# Altium PCB верхняя плата версия 4.PcbDoc
Units mm, origin at the board's own origin, x right, y up, seen from the top; angles counter-clockwise.
Board outline 53 x 45 mm, 4 copper layers (Top Layer, Layer 1, Layer 2, Bottom Layer), stack 1.083 mm thick; 122 components, 141 nets, 830 pads, 120 vias.
Unrouted connection lines stored in the file: 346.
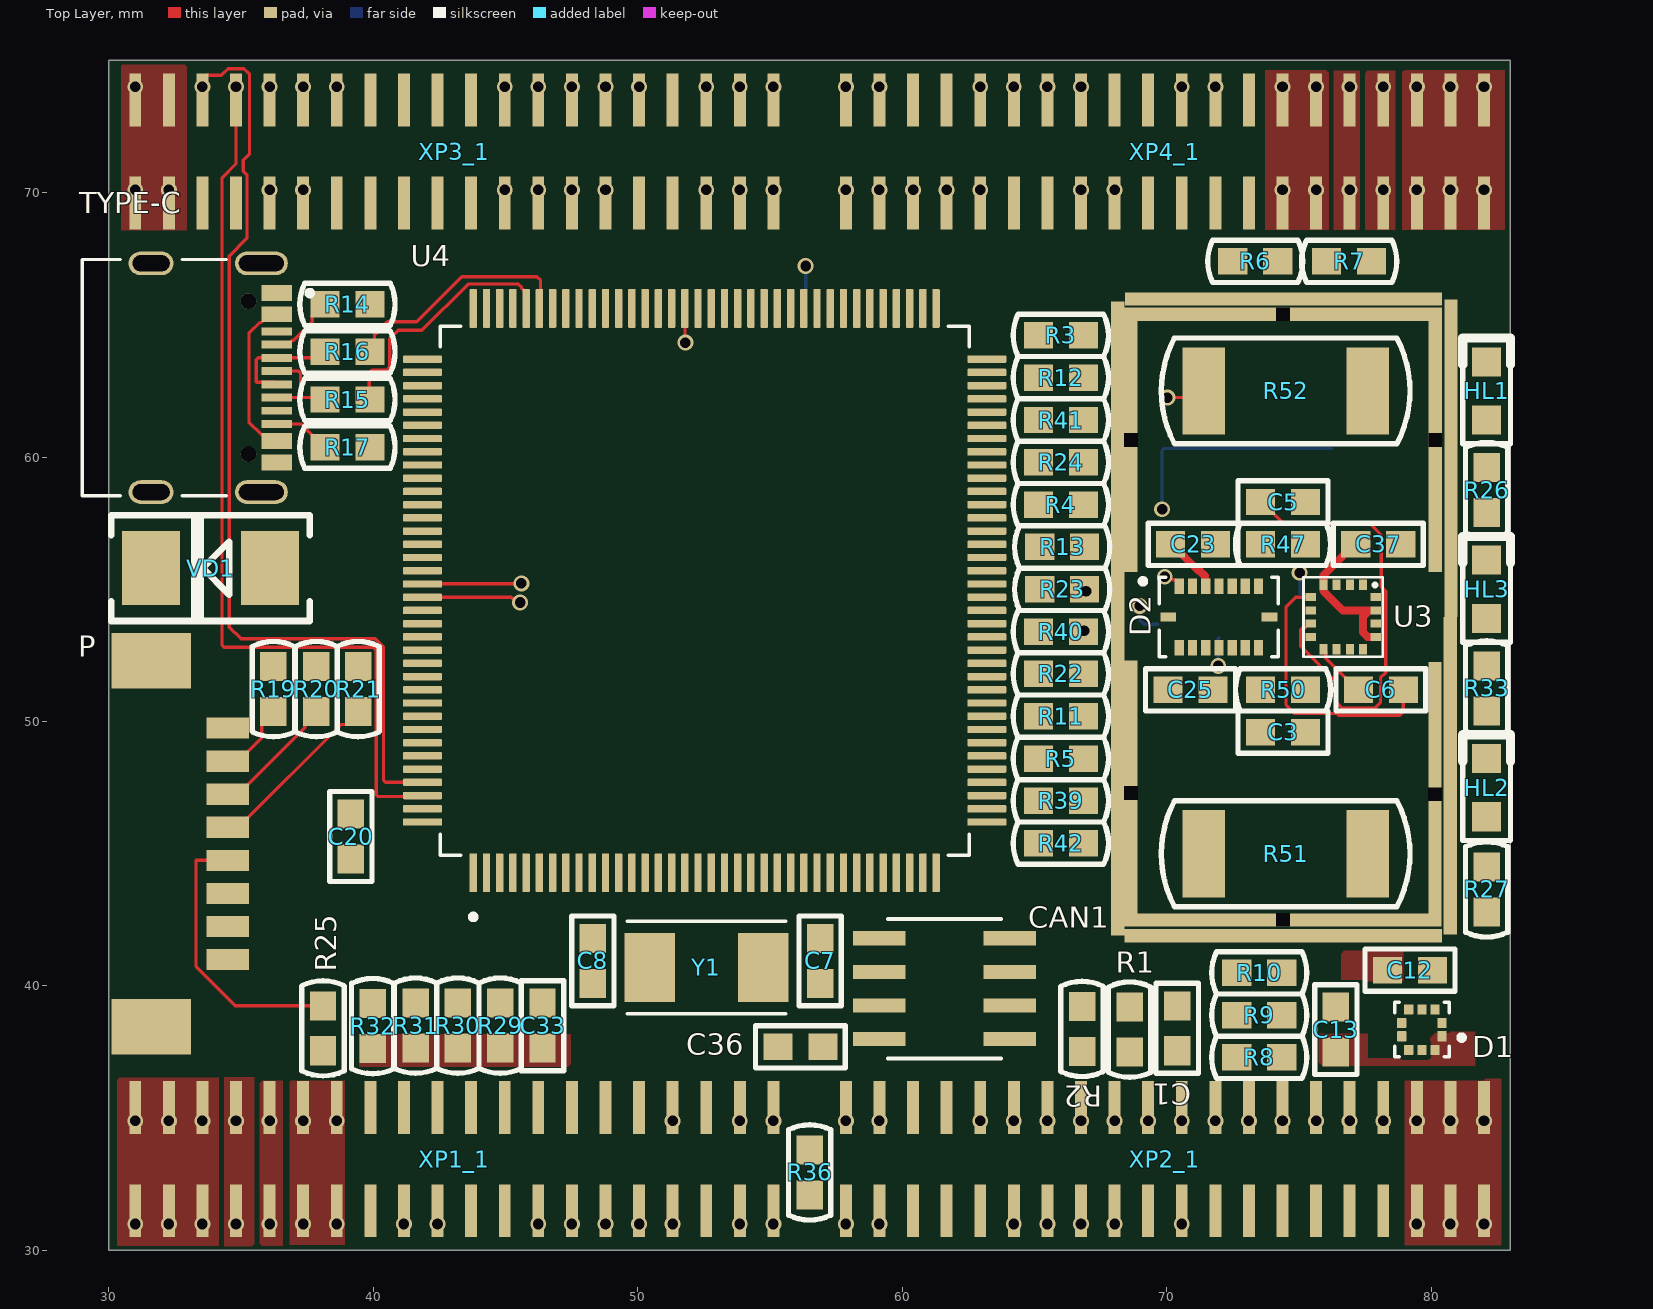
[diagram p0: Top Layer view]
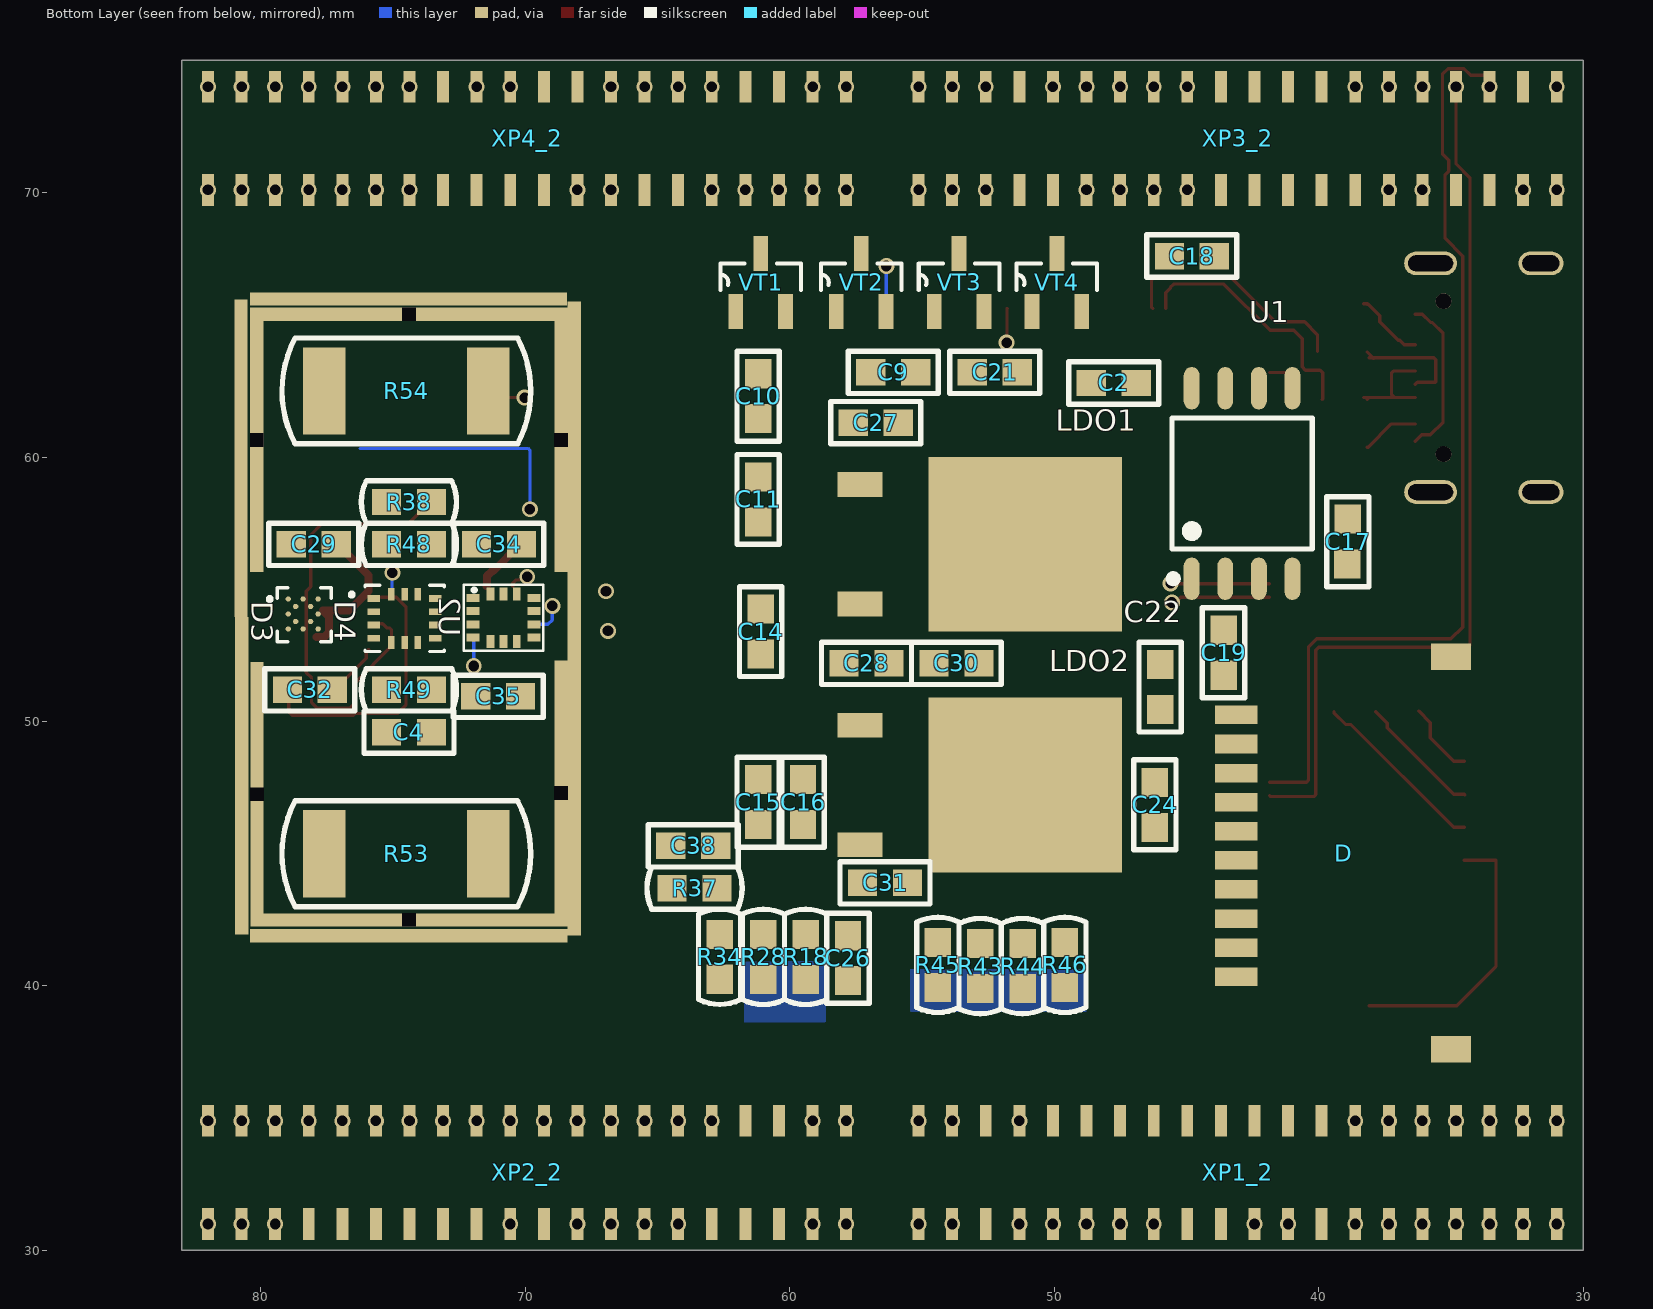
[diagram p1: Bottom Layer view, seen from below]
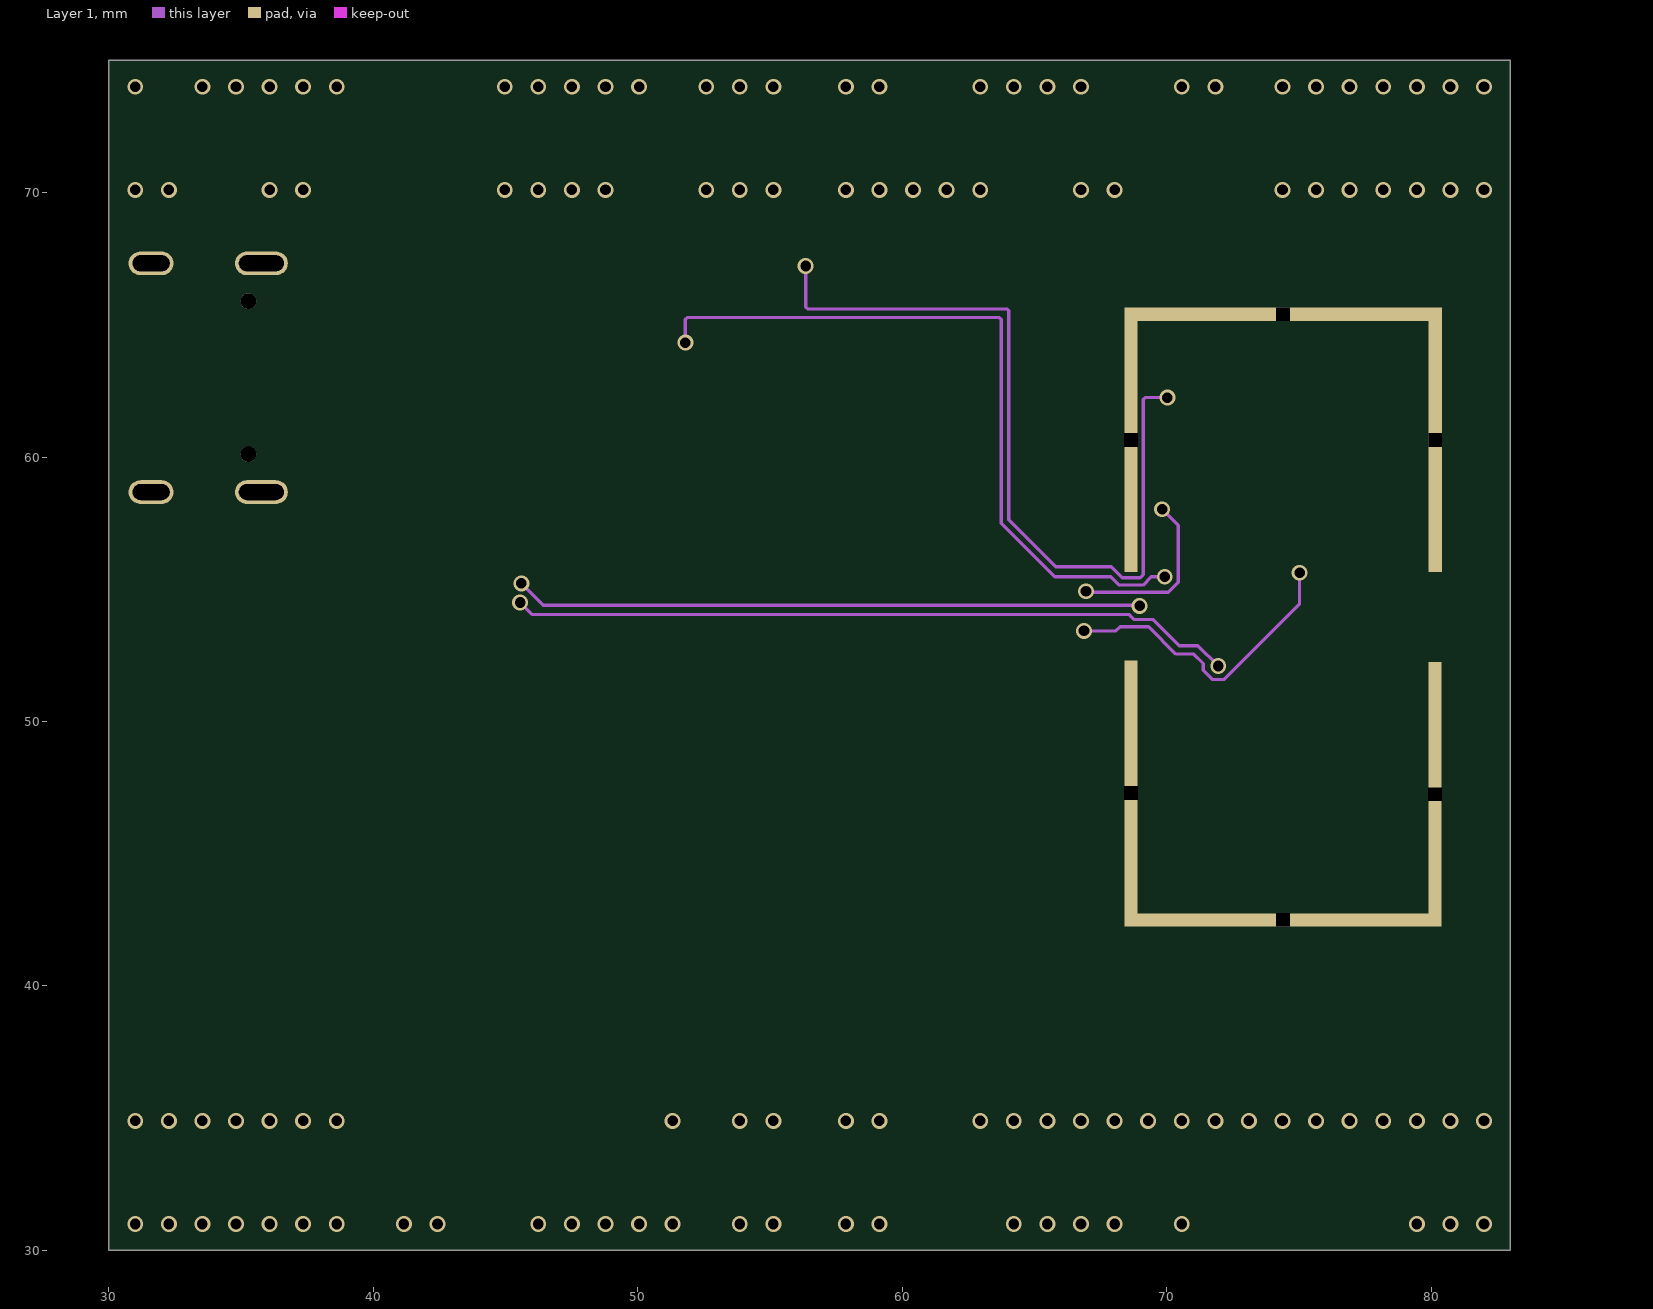
[diagram p2: Layer 1]

## Layer stack, top to bottom
Top Solder: solder mask 0.0102, Solder Resist, Dk 3.5
Top Layer: signal copper 0.0356
Dielectric 2: prepreg 0.0711, PP-006, Dk 4.1
Layer 1: signal copper 0.035
Dielectric 1: core 0.8, FR4 Tg135, Dk 4.5
Layer 2: signal copper 0.035
Dielectric 3: prepreg 0.0711, PP-006, Dk 4.1
Bottom Layer: signal copper 0.0356
Bottom Solder: solder mask 0.0102, Solder Resist, Dk 3.5

## Board outline
30,30 83,30 83,75 30,75

## Design rules (kind name [scope] priority, off if disabled: settings)
Clearance [All] p1: gap=0.125 ignorepadtopadclearanceinfootprint=FALSE except(0.2: Arc-Poly Track-Poly SMDPad-Poly THPad-Poly Via-Poly Fill-Poly Poly-Poly)
ComponentClearance [All] p1: gap=0 collisioncheckmode=3 verticalgap=0 showdistances=FALSE
PolygonConnect [All] p1: connectstyle=Direct reliefconductorwidth=0.254 reliefentries=4 polygonreliefangle="90 Angle" airgapwidth=0.254
RoutingVias [All] p1: holewidth=0.4 width=0.6 viastyle="Through Hole" minholewidth=0.4 minwidth=0.6 maxholewidth=0.4 maxwidth=0.6
SolderMaskExpansion [All] p1: expansion=0.05 istentingtop=FALSE
Width Width_5 [InNet('3V3')] p1: maxlimit=0.3 minlimit=0.3 preferedwidth=0.3 minimp=50.000000 maximp=50.000000 favimp=50.000000
Width Width_4 [InNet('GND')] p2: maxlimit=0.5 minlimit=0.5 preferedwidth=0.5 minimp=50.000000 maximp=50.000000 favimp=50.000000
Width Width_3 [InNet('5V')] p3: maxlimit=0.5 minlimit=0.5 preferedwidth=0.5 minimp=50.000000 maximp=50.000000 favimp=50.000000
Width Width_2 [InNet('4V2')] p4: maxlimit=0.4 minlimit=0.4 preferedwidth=0.4 minimp=50.000000 maximp=50.000000 favimp=50.000000
Width Width_1 [InNet('3V3_SEN')] p5: maxlimit=0.3 minlimit=0.3 preferedwidth=0.3 minimp=50.000000 maximp=50.000000 favimp=50.000000
Width [All] p6: maxlimit=0.125 minlimit=0.125 preferedwidth=0.125 minimp=50.000000 maximp=50.000000 favimp=50.000000
29 further rules are at their usual default settings.

## Components (designator, comment, footprint, x,y, rotation, side; value= is the part's Value field where it differs from the comment)
C1 "47 nF" C0603#1 70.4,38.4 r90 top
C2 "100 nF" C0603#1 47.75,62.8 r180 bottom
C3 "100 nF" C0603#1 74.4,49.6 r0 top
C4 "100 nF" C0603#1 74.4,49.6 r180 bottom
C5 "4.7 uF" C0603#1 74.4,58.3 r180 top
C6 "0.22 uF" C0603#1 78.1,51.2 r180 top
C7 "22 pF" C0603#1 56.9,40.95 r90 top
C8 "22 pF" C0603#1 48.3,40.95 r90 top
C9 "100 nF" C0603#1 56.088,63.2 r180 bottom
C10 "100 nF" C0603#1 61.2,62.3 r90 bottom
C11 "100 nF" C0603#1 61.2,58.4 r90 bottom
C12 "100 nF" C0603#1 79.2,40.6 r180 top
C13 "100 nF" C0603#1 76.4,38.35 r270 top
C14 "100 nF" C0603#1 61.1,53.4 r90 bottom
C15 "100 nF" C0603#1 61.2,46.95 r90 bottom
C16 "100 nF" C0603#1 59.5,46.95 r90 bottom
C17 "100 nF" C0603#2 38.9,56.8 r90 bottom
C18 "100 nF" C0603#1 44.8,67.6 r180 bottom
C19 "100 nF" C0603#1 43.6,52.6 r270 bottom
C20 "100 nF" C0603#1 39.15,45.65 r90 top
C21 "100 nF" C0603#1 52.25,63.2 r180 bottom
C22 "100 nF" C0603#1 46,51.3 r270 bottom
C23 "100 nF" C0603#1 71,56.7 r180 top
C24 "100 nF" C0603#1 46.2,46.85 r270 bottom
C25 "100 nF" C0603#1 70.9,51.2 r180 top
C26 "100 nF" C0603#1 57.8,41.05 r90 bottom
C27 "0.1 uF" C0603#1 56.75,61.3 r0 bottom
C28 "10 uF" C0603#1 57.1,52.2 r180 bottom
C29 "100 nF" C0603#1 78,56.7 r180 bottom
C30 "0.1 uF" C0603#1 53.7,52.2 r0 bottom
C31 "10 uF" C0603#1 56.4,43.9 r0 bottom
C32 "100 nF" C0603#1 78.15,51.2 r180 bottom
C33 "0.1 uF" C0603#1 46.4,38.5 r270 top
C34 "100 nF" C0603#1 71,56.7 r180 bottom
C35 "100 nF" C0603#1 71.025,50.95 r180 bottom
C36 "100 nF" C0603#1 56.15,37.7 r180 top
C37 "100 nF" C0603#1 78,56.7 r180 top
C38 "100 nF" C0603#1 63.65,45.3 r180 bottom
CAN1 "TJA1040T" SO-8_S 61.6,39.9 r0 top
D "D" GTFP08131Y2HR 35.8,45.4 r270 bottom locked
D1 "BMP388" PQFN50P200X200X80-10N 79.65,38.35 r180 top
D2 "BMI088" PQFN50P450X300X100-16N 71.975,53.95 r0 top
D3 "BMM150" XDCR_BMM150 78.365,54.031 r180 bottom
D4 "BMI270" XDCR_BMI270 74.563,53.9 r180 bottom
HL1 "" LD0805 82.1,62.5 r90 top
HL2 "" LD0805 82.1,47.5 r90 top
HL3 "" LD0805 82.1,55 r90 top
LDO1 "КФ1158Н" TO228P972X240-3N 51.252,56.7 r270 bottom
LDO2 "КФ1158Н" TO228P972X240-3N 51.252,47.6 r270 bottom
P "Header 1x8" "PicoBlade 8pin" 34.5,45.385 r270 top
R1 "60Om" R0603 68.6,38.35 r90 top
R2 "60 Om" R0603 66.8,38.375 r90 top
R3 "0" R0603 66,64.6 r180 top
R4 "0" R0603 66,58.2 r180 top
R5 "0" R0603 66,48.6 r180 top
R6 "2.2k" R0603 73.35,67.4 r0 top
R7 "2.2k" R0603 76.9,67.4 r180 top
R8 "0" R0603 73.5,37.3 r0 top
R9 "0" R0603 73.5,38.9 r0 top
R10 "0" R0603 73.5,40.5 r0 top
R11 "0" R0603 66,50.2 r0 top
R12 "0" R0603 66,63 r180 top
R13 "0" R0603 66.05,56.6 r0 top
R14 "5,1 кОм" R0603 39.025,65.775 r180 top
R15 "68" R0603 39.025,62.175 r0 top
R16 "68" R0603 39.025,63.975 r0 top
R17 "5,1 кОм" R0603 39.025,60.375 r0 top
R18 "47 Ом" R0603 59.4,41.1 r90 bottom
R19 "47 кОм" R0603 36.225,51.225 r90 top
R20 "47 кОм" R0603 37.85,51.225 r90 top
R21 "47 кОм" R0603 39.425,51.225 r90 top
R22 "0" R0603 66,51.8 r0 top
R23 "0" R0603 66.05,55 r0 top
R24 "0" R0603 66,59.8 r180 top
R25 "47 кОм" R0603 38.1,38.4 r270 top
R26 "220" R0603 82.1,58.75 r270 top
R27 "220" R0603 82.1,43.65 r270 top
R28 "0" R0603 61,41.1 r270 bottom
R29 "47 кОм" R0603 44.8,38.5 r90 top
R30 "47 кОм" R0603 43.2,38.5 r90 top
R31 "47 кОм" R0603 41.6,38.5 r90 top
R32 "47 кОм" R0603 39.98,38.484 r90 top
R33 "220" R0603 82.1,51.25 r90 top
R34 "0" R0603 62.65,41.103 r90 bottom
R36 "10 kOm" R0603 56.5,32.95 r90 top
R37 "0" R0603 63.6,43.7 r0 bottom
R38 "10 кОм" R0603 74.4,58.3 r0 bottom
R39 "0" R0603 66,47 r0 top
R40 "0" R0603 66,53.4 r0 top
R41 "0" R0603 66,61.4 r0 top
R42 "0" R0603 66,45.4 r0 top
R43 "Resistor" R0603 52.8,40.75 r270 bottom
R44 "Resistor" R0603 51.2,40.75 r270 bottom
R45 "Resistor" R0603 54.4,40.8 r270 bottom
R46 "Resistor" R0603 49.6,40.8 r270 bottom
R47 "Resistor_0,25W" R0603 74.4,56.7 r180 top
R48 "Resistor_0,25W" R0603 74.4,56.7 r0 bottom
R49 "Resistor_0,25W" R0603 74.4,51.2 r0 bottom
R50 "Resistor_0,25W" R0603 74.4,51.2 r0 top
R51 "Resistor_0,25W" R2512 74.5,45 r0 top
R52 "Resistor_0,25W" R2512 74.5,62.5 r0 top
R53 "Resistor_0,25W" R2512 74.5,45 r0 bottom
R54 "Resistor_0,25W" R2512 74.5,62.5 r180 bottom
TYPE-C "TYPE-C-31-M-12" HRO_TYPE-C-31-M-12 31.6,63 r270 top
U1 "W25Q128FVSIG" SOIC127P790X216-8N 42.9,59 r90 bottom
U2 "QMI8658" QMI8658 70.9,53.875 r0 bottom
U3 "QMC5883L" QMC5883L 76.675,54.025 r0 top
U4 "K1921BK01T2" QFP50P2200X2200X160-144N 52.53,54.95 r90 top
VD1 "" DO-214AA 33.85,55.8 r180 top
VT1 "MOSFET-N" SOT95P240X112-3N 61.1,66.6 r90 bottom
VT2 "MOSFET-N" SOT95P240X112-3N 57.3,66.6 r90 bottom
VT3 "MOSFET-N" SOT95P240X112-3N 53.6,66.6 r90 bottom
VT4 "MOSFET-N" SOT95P240X112-3N 49.9,66.6 r90 bottom
XP1_1 "PLLD-1.27-40S" "Headr 2x20 male" 42.851,33.447 r90 top
XP1_2 "PLLD-1.27-40S" "Headr 2x20 Female" 41.962,32.82 r90 bottom
XP2_1 "PLLD-1.27-40S" "Headr 2x20 male" 70.149,33.453 r270 top
XP2_2 "PLLD-1.27-40S" "Headr 2x20 Female" 71.038,33.08 r270 bottom
XP3_1 "PLLD-1.27-40S" "Headr 2x20 male" 42.851,71.547 r90 top
XP3_2 "PLLD-1.27-40S" "Headr 2x20 Female" 41.962,71.92 r90 bottom
XP4_1 "PLLD-1.27-40S" "Headr 2x20 male" 69.721,71.547 r90 top
XP4_2 "PLLD-1.27-40S" "Headr 2x20 Female" 68.832,71.92 r90 bottom
Y1 "8 мгц" XTAL_ABM7-8.000MHZ-8-R80-D2Y-T 52.6,40.7 r0 top

## Footprints (in the part's own frame and the unit in brackets; to place one, negate y for a bottom-side part, rotate by r counter-clockwise, add the part's x,y. Pads: shape width x height; smd on the part's side, far side on the other; paste and mask are expansions set on the pad)
C0603#1 [mm] "1608M"
  rect 1.1x1 smd: 1(-0.85,0) 2(0.85,0)
  silkscreen extent -1.7,-0.8 1.7,0.8, body extent -0.8,-0.4 0.8,0.4, height 0.91
C0603#2 [mm] "1608M"
  rect 1.1x1 smd: 1(-0.85,0.018) 2(0.85,0)
  silkscreen extent -1.7,-0.8 1.7,0.8, body extent -0.8,-0.4 0.8,0.4, height 0.91
DO-214AA [mm] "(SMB) Low profile package"
  rect 2.2x2.8 smd: 1(-2.25,0) 2(2.25,0)
  silkscreen extent -3.75,-2 3.75,2, body extent -2.7,-1.8 2.7,1.8, height 2.3
GTFP08131Y2HR [mm]
  rect 0.7x1.6 smd: 1(-4.85,-7.325) 2(-3.75,-7.325) 3(-2.65,-7.325) 4(-1.55,-7.325) 5(-0.45,-7.325) 6(0.65,-7.325) 7(1.75,-7.325) 8(2.85,-7.325) 9(3.95,-7.325) CD(5.05,-7.325)
  rect 1x1.5 smd: S1(-7.05,0.8) S2(7.8,0.8)
"Headr 2x20 Female" [mm]
  rect 1.2x0.45 smd: 1(-1.82,-10.962) 2(2.08,-10.962) 3(-1.82,-9.692) 4(2.08,-9.692) 5(-1.82,-8.422) 6(2.08,-8.422) 7(-1.82,-7.152) 8(2.08,-7.152) 9(-1.82,-5.882) 10(2.08,-5.882) 11(-1.82,-4.612) 12(2.08,-4.612) 13(-1.82,-3.342) 14(2.08,-3.342) 15(-1.82,-2.072) 16(2.08,-2.072) 17(-1.82,-0.802) 18(2.08,-0.802) 19(-1.82,0.468) 20(2.08,0.468) 21(-1.82,1.738) 22(2.08,1.738) 23(-1.82,3.008) 24(2.08,3.008) 25(-1.82,4.278) 26(2.08,4.278) 27(-1.82,5.548) 28(2.08,5.548) 29(-1.82,6.818) 30(2.08,6.818) 31(-1.82,8.088) 32(2.08,8.088) 33(-1.82,9.358) 34(2.08,9.358) 35(-1.82,10.628) 36(2.08,10.628) 37(-1.82,11.898) 38(2.08,11.898) 39(-1.82,13.168) 40(2.08,13.168)
"Headr 2x20 male" [mm]
  rect 2x0.45 smd: 1(-1.947,11.851) 2(1.953,11.851) 3(-1.947,10.581) 4(1.953,10.581) 5(-1.947,9.311) 6(1.953,9.311) 7(-1.947,8.041) 8(1.953,8.041) 9(-1.947,6.771) 10(1.953,6.771) 11(-1.947,5.501) 12(1.953,5.501) 13(-1.947,4.231) 14(1.953,4.231) 15(-1.947,2.961) 16(1.953,2.961) 17(-1.947,1.691) 18(1.953,1.691) 19(-1.947,0.421) 20(1.953,0.421) 21(-1.947,-0.849) 22(1.953,-0.849) 23(-1.947,-2.119) 24(1.953,-2.119) 25(-1.947,-3.389) 26(1.953,-3.389) 27(-1.947,-4.659) 28(1.953,-4.659) 29(-1.947,-5.929) 30(1.953,-5.929) 31(-1.947,-7.199) 32(1.953,-7.199) 33(-1.947,-8.469) 34(1.953,-8.469) 35(-1.947,-9.739) 36(1.953,-9.739) 37(-1.947,-11.009) 38(1.953,-11.009) 39(-1.947,-12.279) 40(1.953,-12.279)
HRO_TYPE-C-31-M-12 [mm]
  rect 0.6x1.14 smd mask+0.05: A1_B12(-3.2,4.75) A4_B9(-2.4,4.75) B1_A12(3.2,4.75) B4_A9(2.4,4.75)
  rect 0.3x1.14 smd mask+0.05: A5(-1.25,4.75) A6(-0.25,4.75) A7(0.25,4.75) A8(1.25,4.75) B5(1.75,4.75) B6(0.75,4.75) B7(-0.75,4.75) B8(-1.75,4.75)
  oval 0.9x2 hole 0.6 slot 1.7 at 90 deg: S1(-4.325,4.17) S2(4.325,4.17)
  oval 0.9x1.7 hole 0.6 slot 1.4 at 90 deg: S3(-4.325,0) S4(4.325,0)
  round 0.6 hole 0.6 unplated: ""(-2.89,3.68) ""(2.89,3.68)
  silkscreen extent -4.47,-2.6 4.47,6.1, body extent -4.47,-2.6 4.47,5.31, height 3.31
LD0805 [mm]
  rect 1.1x1.1 smd: 1(-1.1,0) 2(1.1,0)
  silkscreen extent -2,-0.9 2,0.9, body extent -1,-0.62 1,0.63, height 0.73
"PicoBlade 8pin" [mm]
  rect 0.8x1.6 smd: 1(-4.365,0) 2(-3.115,0) 3(-1.865,0) 4(-0.615,0) 5(0.635,0) 6(1.885,0) 7(3.135,0) 8(4.385,0)
  rect 2.1x3 smd: S(-6.915,-2.9) S(6.935,-2.9)
PQFN50P200X200X80-10N [mm]
  rrect9% 0.35x0.38 smd: 1(-0.765,0.25) 2(-0.765,-0.25) 3(-0.5,-0.765) 4(0,-0.765) 5(0.5,-0.765) 6(0.765,-0.25) 7(0.765,0.25) 8(0.5,0.765) 9(0,0.765) 10(-0.5,0.765)
  silkscreen extent -1.6,-1.03 1.03,1.03
PQFN50P450X300X100-16N [mm]
  rect 0.35x0.59 smd: 1(-1.5,1.165) 2(-1,1.165) 3(-0.5,1.165) 4(0,1.165) 5(0.5,1.165) 6(1,1.165) 7(1.5,1.165) 9(1.5,-1.165) 10(1,-1.165) 11(0.5,-1.165) 12(0,-1.165) 13(-0.5,-1.165) 14(-1,-1.165) 15(-1.5,-1.165)
  rect 0.59x0.35 smd: 8(1.915,0) 16(-1.915,0)
  silkscreen extent -2.97,-1.5 2.25,1.5
QFP50P2200X2200X160-144N [mm]
  rrect25% 1.47x0.28 smd: 1(-10.67,8.75) 2(-10.67,8.25) 3(-10.67,7.75) 4(-10.67,7.25) 5(-10.67,6.75) 6(-10.67,6.25) 7(-10.67,5.75) 8(-10.67,5.25) 9(-10.67,4.75) 10(-10.67,4.25) 11(-10.67,3.75) 12(-10.67,3.25) 13(-10.67,2.75) 14(-10.67,2.25) 15(-10.67,1.75) 16(-10.67,1.25) 17(-10.67,0.75) 18(-10.67,0.25) 19(-10.67,-0.25) 20(-10.67,-0.75) 21(-10.67,-1.25) 22(-10.67,-1.75) 23(-10.67,-2.25) 24(-10.67,-2.75) 25(-10.67,-3.25) 26(-10.67,-3.75) 27(-10.67,-4.25) 28(-10.67,-4.75) 29(-10.67,-5.25) 30(-10.67,-5.75) 31(-10.67,-6.25) 32(-10.67,-6.75) 33(-10.67,-7.25) 34(-10.67,-7.75) 35(-10.67,-8.25) 36(-10.67,-8.75) 73(10.67,-8.75) 74(10.67,-8.25) 75(10.67,-7.75) 76(10.67,-7.25) 77(10.67,-6.75) 78(10.67,-6.25) 79(10.67,-5.75) 80(10.67,-5.25) 81(10.67,-4.75) 82(10.67,-4.25) 83(10.67,-3.75) 84(10.67,-3.25) 85(10.67,-2.75) 86(10.67,-2.25) 87(10.67,-1.75) 88(10.67,-1.25) 89(10.67,-0.75) 90(10.67,-0.25) 91(10.67,0.25) 92(10.67,0.75) 93(10.67,1.25) 94(10.67,1.75) 95(10.67,2.25) 96(10.67,2.75) 97(10.67,3.25) 98(10.67,3.75) 99(10.67,4.25) 100(10.67,4.75) 101(10.67,5.25) 102(10.67,5.75) 103(10.67,6.25) 104(10.67,6.75) 105(10.67,7.25) 106(10.67,7.75) 107(10.67,8.25) 108(10.67,8.75)
  rrect25% 0.28x1.47 smd: 37(-8.75,-10.67) 38(-8.25,-10.67) 39(-7.75,-10.67) 40(-7.25,-10.67) 41(-6.75,-10.67) 42(-6.25,-10.67) 43(-5.75,-10.67) 44(-5.25,-10.67) 45(-4.75,-10.67) 46(-4.25,-10.67) 47(-3.75,-10.67) 48(-3.25,-10.67) 49(-2.75,-10.67) 50(-2.25,-10.67) 51(-1.75,-10.67) 52(-1.25,-10.67) 53(-0.75,-10.67) 54(-0.25,-10.67) 55(0.25,-10.67) 56(0.75,-10.67) 57(1.25,-10.67) 58(1.75,-10.67) 59(2.25,-10.67) 60(2.75,-10.67) 61(3.25,-10.67) 62(3.75,-10.67) 63(4.25,-10.67) 64(4.75,-10.67) 65(5.25,-10.67) 66(5.75,-10.67) 67(6.25,-10.67) 68(6.75,-10.67) 69(7.25,-10.67) 70(7.75,-10.67) 71(8.25,-10.67) 72(8.75,-10.67) 109(8.75,10.67) 110(8.25,10.67) 111(7.75,10.67) 112(7.25,10.67) 113(6.75,10.67) 114(6.25,10.67) 115(5.75,10.67) 116(5.25,10.67) 117(4.75,10.67) 118(4.25,10.67) 119(3.75,10.67) 120(3.25,10.67) 121(2.75,10.67) 122(2.25,10.67) 123(1.75,10.67) 124(1.25,10.67) 125(0.75,10.67) 126(0.25,10.67) 127(-0.25,10.67) 128(-0.75,10.67) 129(-1.25,10.67) 130(-1.75,10.67) 131(-2.25,10.67) 132(-2.75,10.67) 133(-3.25,10.67) 134(-3.75,10.67) 135(-4.25,10.67) 136(-4.75,10.67) 137(-5.25,10.67) 138(-5.75,10.67) 139(-6.25,10.67) 140(-6.75,10.67) 141(-7.25,10.67) 142(-7.75,10.67) 143(-8.25,10.67) 144(-8.75,10.67)
  silkscreen extent -12.44,-10 10,10
QMC5883L [mm]
  rect 0.4x0.3 smd: 1(1.225,0.675) 2(1.225,0.175) 3(1.225,-0.325) 4(1.225,-0.825) 9(-1.225,-0.825) 10(-1.225,-0.325) 11(-1.225,0.175) 12(-1.225,0.675)
  rect 0.3x0.4 smd: 5(0.75,-1.3) 6(0.25,-1.3) 7(-0.25,-1.3) 8(-0.75,-1.3) 13(-0.75,1.15) 14(-0.25,1.15) 15(0.25,1.15) 16(0.75,1.15)
  silkscreen extent -1.5,-1.58 1.5,1.42
QMI8658 [mm]
  rect 0.5x0.3 smd: 1(1.075,-0.8) 2(1.075,-0.3) 3(1.075,0.2) 4(1.075,0.7) 8(-1.225,0.7) 9(-1.225,0.2) 10(-1.225,-0.3) 11(-1.225,-0.8)
  rect 0.3x0.5 smd: 5(0.425,0.85) 6(-0.075,0.85) 7(-0.575,0.85) 12(-0.575,-0.95) 13(-0.075,-0.95) 14(0.425,-0.95)
  silkscreen extent -1.57,-1.3 1.43,1.2
R0603 [mm] "1608M"
  rect 1.1x1 smd: 1(-0.85,0) 2(0.85,0)
  silkscreen extent -1.8,-0.8 1.8,0.8, body extent -0.8,-0.4 0.8,0.4, height 0.38
R2512 [mm] "6432M"
  rect 1.6x3.3 smd: 1(-3.1,0) 2(3.1,0)
  silkscreen extent -4.7,-2 4.7,2, body extent -3.2,-1.6 3.2,1.6, height 0.7
SO-8_S [mil]
  rect 78x21 smd: 1(-97,75) 2(-97,25) 3(-97,-25) 4(-97,-75) 5(97,-75) 6(97,-25) 7(97,25) 8(97,75)
  silkscreen extent -84,-104 84,104, body extent -96,-118 96,118, height 69
SOIC127P790X216-8N [mm]
  oval 1.6x0.6 smd: 1(-3.6,1.905) 2(-3.6,0.635) 3(-3.6,-0.635) 4(-3.6,-1.905) 5(3.6,-1.905) 6(3.6,-0.635) 7(3.6,0.635) 8(3.6,1.905)
  silkscreen extent -3.82,-2.65 2.48,2.82
SOT95P240X112-3N [mil]
  rect 52x22 smd: 1(-43,37) 2(-43,-37) 3(43,0)
  silkscreen extent -11,-60 28,60
TO228P972X240-3N [mil]
  rect 37x67 smd: 1(-89,-240) 3(89,-240)
  rect 260x288 smd: 2(0,6)
XDCR_BMI270 [mm]
  rect 0.475x0.25 smd: 1(-1.163,0.75) 2(-1.163,0.25) 3(-1.163,-0.25) 4(-1.163,-0.75) 8(1.162,-0.75) 9(1.162,-0.25) 10(1.162,0.25) 11(1.162,0.75)
  rect 0.25x0.475 smd: 5(-0.5,-0.913) 6(0,-0.913) 7(0.5,-0.913) 12(0.5,0.912) 13(0,0.912) 14(-0.5,0.912)
  silkscreen extent -2.08,-1.25 1.5,1.25, body extent -1.5,-1.25 1.5,1.25, height 0.87
XDCR_BMM150 [mm]
  round 0.2 smd: A1(-0.601,0.601) A3(-0.035,0.601) A5(0.531,0.601) B2(-0.318,0.318) B4(0.248,0.318) C1(-0.601,0.035) C5(0.531,0.035) D2(-0.318,-0.248) D4(0.248,-0.248) E1(-0.601,-0.531) E3(-0.035,-0.531) E5(0.531,-0.531)
  silkscreen extent -1.38,-1.02 1.02,1.02
XTAL_ABM7-8.000MHZ-8-R80-D2Y-T [mm]
  rect 1.9x2.6 smd: 1(-2.15,0) 2(2.15,0)
  silkscreen extent -3,-1.75 3,1.75

## Part data
C1 C2 C3 C4 C5 C6 C7 C8 C9 C10 C11 C12 C13 C14 C15 C16 C17 C18 C19 C20 C21 C22 C23 C24 C25 C26 C27 C28 C29 C30 C31 C32 C33 C34 C35 C36 C37 C38: library part Capacitor, Published=18.05.2010, Publisher="Andrew Danich", Type=Конденсатор
D: library part GTFP08131Y2HR
HL1 HL2 HL3: library part Led-1, Published=03.12.2013, Publisher="Andrew Danich", Type="Индикатор единичный"
R1 R2 R3 R4 R5 R6 R7 R8 R9 R10 R11 R12 R13 R14 R15 R16 R17 R18 R19 R20 R21 R22 R23 R24 R25 R26 R27 R28 R29 R30 R31 R32 R33 R34 R36 R37 R38 R39 R40 R41 R42: library part Resistor, Published=24.03.2010, Publisher="Andrew Danich", Type=Резистор
VD1: library part Schottky
Y1: library part ABM7-8.000MHZ-8-R80-D2Y-T, "Crystal 22.1184MHz Ã‚Â±20ppm (Tol) Ã‚Â±30ppm (Stability) 18pF FUND 50Ohm 2-Pin Mini-CSMD T/R", Package=None, Availability=Unavailable, MP=ABM7-8.000MHZ-8-R80-D2Y-T, Price=None
R43 R44 R45 R46: Published=24.03.2010, Publisher="Andrew Danich", Type=Резистор
R47 R48 R49 R50 R51 R52 R53 R54: Published=19.09.2014, Publisher="Andrew Danich", Type=Резистор
VT1 VT2 VT3 VT4: Published=24.09.2010, Publisher="Andrew Danich", Type=Транзистор

## Free pads (board coordinates)
  rect 0.5x12 smd: 17(68.15,47.9) 17(68.152,59.882) 17(80.723,47.943) 17(80.75,59.95)
  rect 0.5x12 smd far side: 17(68.15,47.9) 17(68.152,59.882) 17(80.723,47.943) 17(80.75,59.95)
  rect 0.5x10 hole 0.5 square: 17(68.65,47.3) 17(68.654,60.646) 17(80.146,47.254) 17(80.154,60.646)
  rect 12x0.5 hole 0.5 square: 17(74.4,42.5) 17(74.4,65.4)
  rect 12x0.5 smd: 17(74.407,41.898) 17(74.418,65.977)
  rect 12x0.5 smd far side: 17(74.407,41.898) 17(74.418,65.977)

## Via types
v1: diameter 0.6, hole 0.4, Top Layer to Bottom Layer, 120 vias

## Nets (pads, with @x,y where several pads share a name; then routed paths per layer and width w, separated by ;. In a path a pad name is that pad's centre, name@x,y a point inside that pad or via, vN(x,y) a via of type N, cw(c..) or ccw(c..) an arc to the next point about the centre after c; other vN are vias at no path point)
3V3: C2.2 C9.2 C10.2 C11.2 C14.2 C15.2 C16.2 C17.2 C18.2 C19.2 C20.2 C21.2 C22.2 C24.2 C28.2 C33.2 C38.2 D.4 LDO1.3 P.1 R18.1 R19.2 R20.2 R21.2 R26.2 R27.2 R28.2 R29.1 R30.1 R31.1 R32.1 R33.2 R43.2 R44.2 R45.2 R46.2 U1.8 U4.6 U4.17 U4.30 U4.33 U4.39 U4.52 U4.62 U4.72 U4.84 U4.95 U4.108 U4.121 U4.131 U4.144 XP1_1.9 XP1_1.10 XP1_2.9 XP1_2.10 XP4_1.31 XP4_1.32 XP4_2.31 XP4_2.32
  other v1: 36.08,31 36.08,34.9 76.92,70.1 76.92,74
3V3_SEN: C3.2 C4.2 C12.2 C13.2 C23.2 C25.2 C29.2 C31.2 C32.2 C37.2 D1.1 D1.10 D2.3 D2.11 D3.B2 D3.E5 LDO2.3 R6.2 R7.2 R38.2 R42.2 U2.5 U2.8 U3.2 U3.4 U3.13 | length 8
  Top Layer w0.3: C23.2 70.2,56.7 71.215,55.685 71.264,55.685 71.45,55.499 71.45,55.14 D2.3 ; C37.2 77.1,56.7 75.925,55.525 U3.13 75.925,54.936 76.661,54.2 77.661,54.2 77.425,53.964 77.425,53.376 77.601,53.2 U3.4
4V2: XP1_1.11 XP1_1.12 XP1_1.13 XP1_1.14 XP1_2.11 XP1_2.12 XP1_2.13 XP1_2.14 XP4_1.27 XP4_1.28 XP4_1.29 XP4_1.30 XP4_2.27 XP4_2.28 XP4_2.29 XP4_2.30
  other v1: 37.35,31 38.62,31 37.35,34.9 38.62,34.9 74.38,70.1 75.65,70.1 74.38,74 75.65,74
5V: C27.2 C30.2 C36.1 CAN1.3 LDO1.1 LDO2.1 XP1_1.7 XP1_1.8 XP1_2.7 XP1_2.8 XP4_1.33 XP4_1.34 XP4_2.33 XP4_2.34
  other v1: 34.81,31 34.81,34.9 78.19,70.1 78.19,74
GND: C1.1 C2.1 C3.1 C4.1 C5.1 C7.1 C8.1 C9.1 C10.1 C11.1 C12.1 C13.1 C14.1 C15.1 C16.1 C17.1 C18.1 C19.1 C20.1 C21.1 C22.1 C23.1 C24.1 C25.1 C26.1 C27.1 C28.1 C29.1 C30.1 C31.1 C32.1 C33.1 C34.1 C35.1 C36.2 C37.1 C38.1 CAN1.2 CAN1.8 D1.3 D1.8 D1.9 D2.2 D2.4 D2.6 D2.7 D3.A1 D3.C5 D3.E1 D3.E3 D4.6 D4.7 D.6 D.S1 D.S2 HL3.2 LDO1.2 LDO2.2 P.6 R14.1 R17.2 R25.2 R34.1 R36.2 R37.2 R47.2 R48.2 R49.2 R50.2 R51.2 R52.2 R53.2 R54.2 TYPE-C.A1_B12 TYPE-C.B1_A12 U1.4 U2.6 U2.7 U3.9 U3.11 U4.16 U4.38 U4.51 U4.61 U4.83 U4.94 U4.107 U4.120 U4.130 XP1_1.37 XP1_1.38 XP1_1.39 XP1_1.40 XP1_2.37 XP1_2.38 XP1_2.39 XP1_2.40 XP2_1.1 XP2_1.2 XP2_1.3 XP2_1.4 XP2_1.5 XP2_1.6 XP2_1.37 XP2_1.38 XP2_1.39 XP2_1.40 XP2_2.1 XP2_2.2 XP2_2.3 XP2_2.4 XP2_2.5 XP2_2.6 XP2_2.37 XP2_2.38 XP2_2.39 XP2_2.40 XP3_1.1 XP3_1.2 XP3_1.3 XP3_1.4 XP3_1.35 XP3_1.36 XP3_1.37 XP3_1.38 XP3_1.39 XP3_1.40 XP3_2.1 XP3_2.2 XP3_2.3 XP3_2.4 XP3_2.35 XP3_2.36 XP3_2.37 XP3_2.38 XP3_2.39 XP3_2.40 XP4_1.1 XP4_1.2 XP4_1.3 XP4_1.4 XP4_2.1 XP4_2.2 XP4_2.3 XP4_2.4
  other v1: 53.86,31 55.13,31 57.87,31 59.14,31 79.46,31 80.73,31 82,31 53.86,34.9 55.13,34.9 57.87,34.9 59.14,34.9 79.46,34.9 80.73,34.9 82,34.9 31,70.1 32.27,70.1 52.59,70.1 53.86,70.1 55.13,70.1 57.87,70.1 59.14,70.1 31,74 52.59,74 53.86,74 55.13,74 57.87,74 59.14,74
NetC1_2: C1.2 CAN1.5 R1.2 R2.2
NetC5_2: C5.2 U3.10 | length 17.2
  Top Layer w0.125: C5.2 73.6,58.3 74.442,57.458 77.708,57.458 78.112,57.053 78.112,55.103 78.288,54.928 78.288,51.853 78.083,51.648 78.083,50.717 77.878,50.512 76.622,50.512 76.425,50.71 76.425,51.475 75.062,52.838 75.062,53.464 75.136,53.537 75.237,53.537 75.4,53.7 U3.10
NetC6_1: C6.1 U3.12 | length 10.3
  Top Layer w0.125: U3.12 74.873,54.7 74.512,54.339 74.512,50.622 74.835,50.3 76.446,50.3 76.508,50.237 78.812,50.237 78.95,50.375 C6.1
NetC6_2: C6.2 U3.8 | length 2.1
  Top Layer w0.125: U3.8 76.013,52.638 76.013,52.387 77.2,51.2 C6.2
NetC7_2: C7.2 U4.24 Y1.2
NetC8_2: C8.2 U4.23 Y1.1
NetC26_2: C26.2 R18.2 U4.32
NetC34_2: C34.2 D4.5 R42.1
NetC35_2: C35.2 D4.8
NetCAN1_1: CAN1.1 U4.74
NetCAN1_4: CAN1.4 U4.73
NetCAN1_6: CAN1.6 R2.1 XP2_1.26 XP2_2.26
  other v1: 66.76,31
NetCAN1_7: CAN1.7 R1.1 XP2_1.24 XP2_2.24
  other v1: 68.03,31
NetD1_2: D1.2 R8.2
NetD1_4: D1.4 R9.2
NetD1_5: D1.5 R10.2
NetD1_6: D1.6 U4.49
NetD1_7: D1.7 U4.125
NetD2_1: D2.1 U4.92 | length 29.9
  Top Layer w0.125: U4.92 51.79,65.61 51.79,64.335 v1(51.8,64.325) ; v1(69.925,55.475) 70.115,55.475 70.242,55.348 70.362,55.348 70.475,55.235 D2.1
  Layer 1 w0.125: v1(51.8,64.325) 51.8,65.202 51.873,65.275 63.677,65.275 63.75,65.202 63.75,57.5 65.775,55.475 67.886,55.475 68.202,55.158 69.106,55.158 69.423,55.475 v1(69.925,55.475)
NetD2_5: D2.5 U4.50
NetD2_8: D2.8 R11.2
NetD2_9: D2.9 R13.2
NetD2_10: D2.10 D2.15 R12.1
NetD2_12: D2.12 U4.91
NetD2_13: D2.13 U4.90
NetD2_14: D2.14 U4.53
NetD2_16: D2.16 U4.93
NetD3_A3: D3.A3 R22.2
NetD3_A5: D3.A5 U4.55
NetD3_B4: D3.B4 R23.2 | length 15.4
  Layer 1 w0.125: v1(66.95,54.925) 66.992,54.883 70.058,54.883 70.438,55.263 70.438,57.412 v1(69.825,58.025)
  Bottom Layer w0.125: v1(69.825,58.025) 69.825,60.252 69.898,60.325 76.25,60.325
NetD3_C1: D3.C1 R24.1
NetD3_D2: D3.D2 U4.89
NetD4_1: D4.1 R41.2
NetD4_4: D4.4 U4.88
NetD4_9: D4.9 U4.132
NetD4_12: D4.12 R38.1 U4.22
NetD4_13: D4.13 R39.2
NetD4_14: D4.14 R40.2 | length 12.4
  Layer 1 w0.125: v1(66.875,53.425) 68.081,53.425 68.239,53.583 69.317,53.583 70.35,52.55 71.025,52.55 71.381,52.194 71.381,51.944 71.738,51.587 72.162,51.587 75.025,54.45 v1(75.025,55.625)
  Bottom Layer w0.125: v1(75.025,55.625) 75.044,55.606 75.044,54.831 D4.14
NetD_1: D.1 R31.2 U4.101
NetD_2: D.2 R32.2
NetD_3: D.3 U4.42
NetD_5: D.5 U4.48
NetD_7: D.7 R29.2 U4.98
NetD_8: D.8 R30.2 U4.100
NetHL1_1: HL1.1 R26.1
NetHL1_2: HL1.2 U4.8
NetHL2_1: HL2.1 R27.1
NetHL2_2: HL2.2 U4.9
NetHL3_1: HL3.1 R33.1
NetP_2: P.2 R19.1 | length 2.8
  Top Layer w0.125: P.2 34.9,48.5 35.787,49.387 35.787,49.963 R19.1@36.225,50.4
NetP_3: P.3 R20.1 U4.110 XP1_1.31 XP1_2.31 | length 5.4
  Top Layer w0.125: P.3@34.475,47.225 P.3 34.9,47.25 37.413,49.763 37.413,49.938 R20.1 ; U4.110@41.265,63.2 U4.110
  other v1: 50.05,31
NetP_4: P.4 R21.1 U4.105 | length 6.8
  Top Layer w0.125: P.4 34.9,46 38.788,49.888 38.988,49.888 39.425,50.325 R21.1
NetP_5: P.5 R25.1 U4.109 | length 10.6
  Top Layer w0.125: P.5 33.3,44.75 33.3,40.735 34.785,39.25 R25.1
NetP_7: P.7 R5.2 R8.1 R11.1 R22.1 R39.1 U4.133 XP1_1.29 XP1_2.29
  other v1: 48.78,31
NetP_8: P.8 U4.25
NetR3_1: R3.1 U2.1
NetR3_2: R3.2 R10.1 R12.2 R24.2 R41.1 U4.134 XP1_1.25 XP1_2.25
  other v1: 46.24,31
NetR4_1: R4.1 U2.14
NetR4_2: R4.2 R9.1 R13.1 R23.1 R40.1 U4.135 XP1_1.27 XP1_2.27
  other v1: 47.51,31
NetR5_1: R5.1 U2.13
NetR6_1: R6.1 U3.16 U4.10 XP3_1.9 XP3_2.9
  other v1: 36.08,70.1
NetR7_1: R7.1 U3.1 U4.11 XP3_1.11 XP3_2.11
  other v1: 37.35,70.1
NetR14_2: R14.2 TYPE-C.A5 | length 2.8
  Top Layer w0.125: TYPE-C.A5 36.77,64.25 36.932,64.412 36.998,64.412 37.692,65.107 37.692,65.338 38.155,65.8 R14.2@38.3,65.8 ; R14.2@38.125,65.775 R14.2
NetR15_1: R15.1 TYPE-C.A6 TYPE-C.B6 | length 3.9
  Top Layer w0.125: TYPE-C.B6 37.125,62.25 ; TYPE-C.A6 37.177,63.25 37.25,63.177 37.25,62.375 37.125,62.25 ; R15.1@38.125,62.225 R15.1 ; R15.1@38.3,62.25 37.125,62.25
NetR15_2: R15.2 U4.104 | length 9.7
  Top Layer w0.125: R15.2 39.85,62.2 39.85,63.187 39.951,63.287 40.503,63.287 40.625,63.41 40.625,64.475 40.95,64.8 41.84,64.8 43.583,66.542 45.477,66.542 45.608,66.412 45.608,66.387 45.78,66.215 U4.104
NetR16_1: R16.1 TYPE-C.A7 TYPE-C.B7 | length 4.6
  Top Layer w0.125: TYPE-C.A7 36.269,62.831 35.592,62.831 35.575,62.848 35.575,63.677 35.648,63.75 TYPE-C.B7 R16.1@38.1,63.75 ; R16.1@37.925,63.725 R16.1
NetR16_2: R16.2 U4.103 | length 8.9
  Top Layer w0.125: R16.2@40.05,64 40.05,64.625 40.538,65.113 41.638,65.113 43.342,66.817 46.184,66.817 46.325,66.677 46.325,65.665 U4.103
NetR17_1: R17.1 TYPE-C.B5 | length 2.2
  Top Layer w0.125: TYPE-C.B5 37.25,61.25 38.125,60.375 R17.1
NetR28_1: R28.1 R34.2 U4.34
NetR36_1: R36.1 U4.138 XP2_1.20 XP2_2.20
  other v1: 70.57,31
NetR37_1: R37.1 U4.31 XP3_1.32 XP3_2.32
  other v1: 50.05,74
NetR43_1: R43.1 R48.1 U4.19
NetR44_1: R44.1 R49.1 U4.20
NetR45_1: R45.1 R50.1 U4.21
NetR46_1: R46.1 R47.1 U4.18
NetR51_1: R51.1 VT1.2
NetR52_1: R52.1 VT2.2 | length 34
  Top Layer w0.125: v1(70.025,62.25) 71.15,62.25 R52.1
  Layer 1 w0.125: v1(56.35,67.225) 56.35,65.673 56.423,65.6 63.952,65.6 64.025,65.527 64.025,57.625 65.8,55.85 67.9,55.85 68,55.75 ; 68,55.75 68.316,55.433 68.992,55.433 69.117,55.558 69.117,62.177 69.19,62.25 v1(70.025,62.25)
  Bottom Layer w0.125: v1(56.35,67.225) 56.35,65.518 VT2.2
NetR53_1: R53.1 VT3.2
NetR54_1: R54.1 VT4.2
NetTYPE-C_A4_B9: TYPE-C.A4_B9 TYPE-C.B4_A9 | length 6.1
  Top Layer w0.125: TYPE-C.B4_A9 36.113,60.837 35.777,60.837 35.3,61.315 35.3,64.685 35.702,65.088 35.768,65.088 36.08,65.4 TYPE-C.A4_B9
NetU1_1: U1.1 U4.123
NetU1_2: U1.2 U4.86
NetU1_3: U1.3 U4.114
NetU1_5: U1.5 U4.85
NetU1_6: U1.6 U4.117
NetU1_7: U1.7 U4.115
NetU2_4: U2.4 U4.127 | length 32.2
  Top Layer w0.125: U4.127 45.221,54.7 45.421,54.5 v1(45.55,54.5)
  Layer 1 w0.125: v1(45.55,54.5) 46,54.05 68.571,54.05 68.763,53.858 69.479,53.858 70.467,52.87 71.18,52.87 v1(71.95,52.1)
  Bottom Layer w0.125: v1@71.95,52.15 71.95,53.15 U2.4
NetU2_9: U2.9 U4.126 | length 28.8
  Top Layer w0.125: U4.126 41.873,55.212 45.587,55.212 v1(45.6,55.225)
  Layer 1 w0.125: v1(45.6,55.225) 46.425,54.4 68.946,54.4 v1(68.975,54.371)
  Bottom Layer w0.125: v1(68.975,54.371) 68.986,54.36 68.986,53.837 69.148,53.675 U2.9
NetU2_12: U2.12 U4.54
NetU4_1: U4.1 XP3_1.10 XP3_2.10
  other v1: 36.08,74
NetU4_2: U4.2 XP3_1.12 XP3_2.12
  other v1: 37.35,74
NetU4_3: U4.3 XP3_1.14 XP3_2.14
  other v1: 38.62,74
NetU4_4: U4.4 XP4_1.5 XP4_2.5
  other v1: 60.41,70.1
NetU4_5: U4.5 XP4_1.7 XP4_2.7
  other v1: 61.68,70.1
NetU4_14: U4.14 XP4_1.15 XP4_2.15
  other v1: 66.76,70.1
NetU4_15: U4.15 XP4_1.17 XP4_2.17
  other v1: 68.03,70.1
NetU4_26: U4.26 XP3_1.24 XP3_2.24
  other v1: 44.97,74
NetU4_27: U4.27 XP3_1.26 XP3_2.26
  other v1: 46.24,74
NetU4_28: U4.28 XP3_1.28 XP3_2.28
  other v1: 47.51,74
NetU4_29: U4.29 XP3_1.30 XP3_2.30
  other v1: 48.78,74
NetU4_35: U4.35 XP2_1.25 XP2_2.25
  other v1: 66.76,34.9
NetU4_36: U4.36 XP1_1.19 XP1_2.19
  other v1: 42.43,31
NetU4_37: U4.37 XP1_1.17 XP1_2.17
  other v1: 41.16,31
NetU4_40: U4.40 XP1_1.33 XP1_2.33
  other v1: 51.32,31
NetU4_41: U4.41 XP2_1.17 XP2_2.17
  other v1: 71.84,34.9
NetU4_43: U4.43 XP2_1.27 XP2_2.27
  other v1: 65.49,34.9
NetU4_45: U4.45 XP4_1.14 XP4_2.14
  other v1: 65.49,74
NetU4_46: U4.46 XP2_1.19 XP2_2.19
  other v1: 70.57,34.9
NetU4_47: U4.47 XP2_1.21 XP2_2.21
  other v1: 69.3,34.9
NetU4_58: U4.58 XP4_1.9 XP4_2.9
  other v1: 62.95,70.1
NetU4_60: U4.60 XP2_1.7 XP2_2.7
  other v1: 78.19,34.9
NetU4_64: U4.64 XP2_1.9 XP2_2.9
  other v1: 76.92,34.9
NetU4_66: U4.66 XP2_1.11 XP2_2.11
  other v1: 75.65,34.9
NetU4_67: U4.67 XP2_1.13 XP2_2.13
  other v1: 74.38,34.9
NetU4_69: U4.69 XP4_1.12 XP4_2.12
  other v1: 64.22,74
NetU4_70: U4.70 XP4_1.10 XP4_2.10
  other v1: 62.95,74
NetU4_75: U4.75 XP4_1.16 XP4_2.16
  other v1: 66.76,74
NetU4_77: U4.77 VT1.1
NetU4_78: U4.78 VT2.1
NetU4_79: U4.79 VT3.1
NetU4_80: U4.80 VT4.1
NetU4_81: U4.81 XP2_1.29 XP2_2.29
  other v1: 64.22,34.9
NetU4_82: U4.82 XP2_1.31 XP2_2.31
  other v1: 62.95,34.9
NetU4_99: U4.99 XP2_1.23 XP2_2.23
  other v1: 68.03,34.9
NetU4_111: U4.111 XP3_1.23 XP3_2.23
  other v1: 44.97,70.1
NetU4_112: U4.112 XP3_1.25 XP3_2.25
  other v1: 46.24,70.1
NetU4_113: U4.113 XP2_1.30 XP2_2.30
  other v1: 64.22,31
NetU4_116: U4.116 XP2_1.28 XP2_2.28
  other v1: 65.49,31
NetU4_124: U4.124 XP1_1.36 XP1_2.36 XP4_1.24 XP4_2.24
  other v1: 71.84,74
NetU4_129: U4.129 XP1_1.34 XP1_2.34 XP4_1.22 XP4_2.22
  other v1: 51.32,34.9 70.57,74
NetU4_136: U4.136 XP3_1.29 XP3_2.29
  other v1: 48.78,70.1
NetU4_137: U4.137 XP3_1.27 XP3_2.27
  other v1: 47.51,70.1
NetU4_139: U4.139 XP2_1.15 XP2_2.15
  other v1: 73.11,34.9
NetU4_141: U4.141 XP3_1.6 XP3_2.6 | length 36.3
  Top Layer w0.125: v1(33.54,74) 33.54,74.275 33.702,74.437 34.257,74.437 34.507,74.687 35.113,74.687 35.322,74.478 35.322,71.463 35.085,71.225 35.085,70.815 35.222,70.678 35.222,68.264 34.558,67.599 34.558,53.568 35,53.125 40.079,53.125 40.388,52.817 40.388,47.773 40.461,47.7 U4.141
NetU4_142: U4.142 XP3_1.8 XP3_2.8 | length 34.5
  Top Layer w0.125: v1(34.81,74) 34.81,71.09 34.282,70.563 34.282,52.886 34.356,52.813 40.003,52.813 40.113,52.703 40.113,47.238 40.186,47.164 41.824,47.164 U4.142
VCC: VT1.3 VT2.3 VT3.3 VT4.3 XP1_1.1 XP1_1.2 XP1_1.3 XP1_1.4 XP1_1.5 XP1_1.6 XP1_2.1 XP1_2.2 XP1_2.3 XP1_2.4 XP1_2.5 XP1_2.6 XP4_1.35 XP4_1.36 XP4_1.37 XP4_1.38 XP4_1.39 XP4_1.40 XP4_2.35 XP4_2.36 XP4_2.37 XP4_2.38 XP4_2.39 XP4_2.40
  other v1: 31,31 32.27,31 33.54,31 31,34.9 32.27,34.9 33.54,34.9 79.46,70.1 80.73,70.1 82,70.1 79.46,74 80.73,74 82,74
pads on no net: D3.D4 D4.2 D4.3 D4.10 D4.11 D.9 D.CD P.S TYPE-C. TYPE-C.A8 TYPE-C.B8 TYPE-C.S1 TYPE-C.S2 TYPE-C.S3 TYPE-C.S4 U2.2 U2.3 U2.10 U2.11 U3.3 U3.5 U3.6 U3.7 U3.14 U3.15 U4.7 U4.12 U4.13 U4.44 U4.56 U4.57 U4.59 U4.63 U4.65 U4.68 U4.71 U4.76 U4.87 U4.96 U4.97 U4.102 U4.106 U4.118 U4.119 U4.122 U4.128 U4.140 U4.143 VD1.1 VD1.2 XP1_1.15 XP1_1.16 XP1_1.18 XP1_1.20 XP1_1.21 XP1_1.22 XP1_1.23 XP1_1.24 XP1_1.26 XP1_1.28 XP1_1.30 XP1_1.32 XP1_1.35 XP1_2.15 XP1_2.16 XP1_2.18 XP1_2.20 XP1_2.21 XP1_2.22 XP1_2.23 XP1_2.24 XP1_2.26 XP1_2.28 XP1_2.30 XP1_2.32 XP1_2.35 XP2_1.8 XP2_1.10 XP2_1.12 XP2_1.14 XP2_1.16 XP2_1.18 XP2_1.22 XP2_1.32 XP2_1.33 XP2_1.34 XP2_1.35 XP2_1.36 XP2_2.8 XP2_2.10 XP2_2.12 XP2_2.14 XP2_2.16 XP2_2.18 XP2_2.22 XP2_2.32 XP2_2.33 XP2_2.34 XP2_2.35 XP2_2.36 XP3_1.5 XP3_1.7 XP3_1.13 XP3_1.15 XP3_1.16 XP3_1.17 XP3_1.18 XP3_1.19 XP3_1.20 XP3_1.21 XP3_1.22 XP3_1.31 XP3_1.33 XP3_1.34 XP3_2.5 XP3_2.7 XP3_2.13 XP3_2.15 XP3_2.16 XP3_2.17 XP3_2.18 XP3_2.19 XP3_2.20 XP3_2.21 XP3_2.22 XP3_2.31 XP3_2.33 XP3_2.34 XP4_1.6 XP4_1.8 XP4_1.11 XP4_1.13 XP4_1.18 XP4_1.19 XP4_1.20 XP4_1.21 XP4_1.23 XP4_1.25 XP4_1.26 XP4_2.6 XP4_2.8 XP4_2.11 XP4_2.13 XP4_2.18 XP4_2.19 XP4_2.20 XP4_2.21 XP4_2.23 XP4_2.25 XP4_2.26

## Polygon pours and split planes (outlines as drawn)
5V on Top Layer "NONET_L-01_P-001" (solid, remove dead copper, pour order 17): 77.5,74.608 77.5,68.6 78.65,68.6 78.65,74.6
3V3 on Top Layer "NONET_L-01_P-001" (solid, remove dead copper, pour order 18): 76.35,74.608 76.325,74.65 76.325,68.6 77.275,68.6 77.5,68.375 77.5,74.608
3V3 on Top Layer "NONET_L-01_P-001" (solid, remove dead copper, pour order 3): 35.7,36.413 35.7,30.175 36.575,30.175 36.575,36.413
3V3 on Top Layer "NONET_L-01_P-001" (solid, remove dead copper, pour order 26): 39.475,38.175 39.475,36.943 47.368,36.943 47.475,37.05 47.475,38.175
3V3_SEN on Top Layer "NONET_L-01_P-001" (solid, remove dead copper, pour order 8): 81.675,38.275 81.675,36.975 75.875,36.975 75.75,37.1 75.75,38.2 77.6,38.2 77.6,37.3 77.575,37.275 79.95,37.275 79.95,38.025 80.2,38.275
4V2 on Top Layer "NONET_L-01_P-001" (solid, remove dead copper, pour order 4): 36.8,36.425 36.85,36.375 36.85,30.225 38.925,30.225 38.925,30.6 38.925,36.425
4V2 on Top Layer "NONET_L-01_P-001" (solid, remove dead copper, pour order 19): 73.725,74.625 73.725,68.6 76.15,68.6 76.15,74.625
VCC on Top Layer "NONET_L-01_P-001" (solid, remove dead copper, pour order 16): 78.85,74.625 78.9,74.575 78.9,68.6 82.775,68.6 82.775,74.625
3V3_SEN on Top Layer "NONET_L-01_P-001" (solid, remove dead copper, pour order 9): 76.55,41.35 76.6,41.3 76.6,40.1 78.875,40.1 78.95,40.175 78.95,41.325
GND on Top Layer "NONET_L-01_P-001" (solid, remove dead copper, pour order 5): 79,36.525 79,30.2 82.65,30.2 82.65,36.5
5V on Top Layer "NONET_L-01_P-001" (solid, remove dead copper, pour order 2): 34.4,36.55 34.375,36.525 34.375,30.15 35.4,30.15 35.425,30.125 35.5,30.2 35.5,36.55
VCC on Top Layer "NONET_L-01_P-001" (solid, remove dead copper, pour order 1): 30.325,36.55 30.325,30.175 34.15,30.175 34.15,36.525
GND on Top Layer "NONET_L-01_P-001" (solid, remove dead copper, pour order 0): 30.5,74.825 30.475,74.8 30.475,68.575 32.95,68.575 32.95,74.85
3V3 on Bottom Layer "NONET_L-01_P-001" (solid, remove dead copper, pour order 21): 58.65,40.95 58.65,38.65 58.675,38.625 61.725,38.625 61.725,40.925
3V3 on Bottom Layer "NONET_L-01_P-001" (solid, remove dead copper, pour order 20): 48.8,40.65 48.8,39.025 55.425,39.025 55.45,39.05 55.45,40.625

## Text inside footprints (layer, text, board x,y; h text height)
TYPE-C: Mechanical 13 "PCB EDGE" at 29.7,57.8 h0.61 r270